# EAGLE board test (EAGLE 6.3)
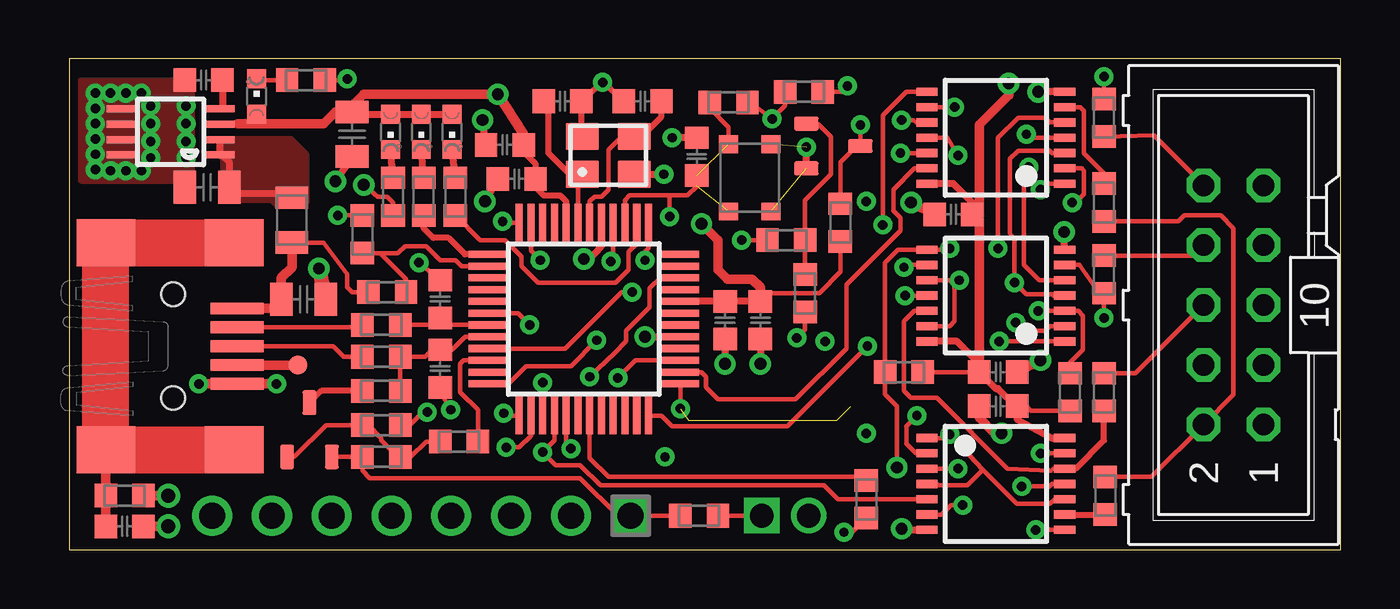
[diagram p0: board, top side]
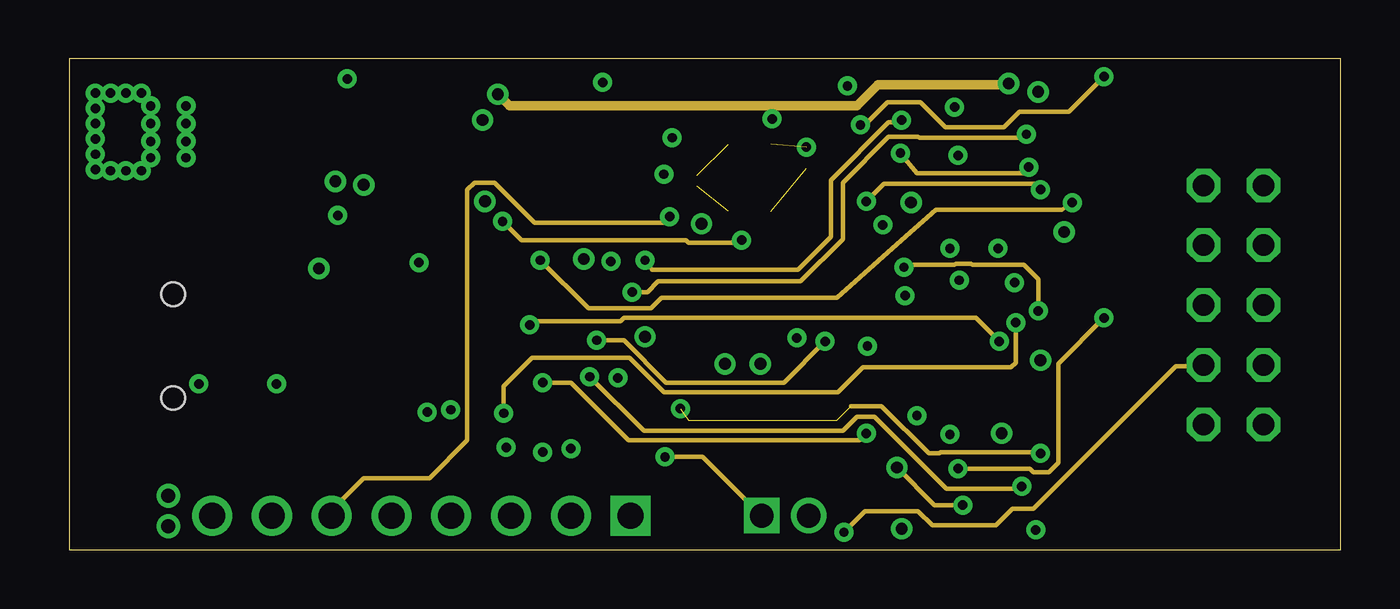
[diagram p1: board, inner layer Route2]
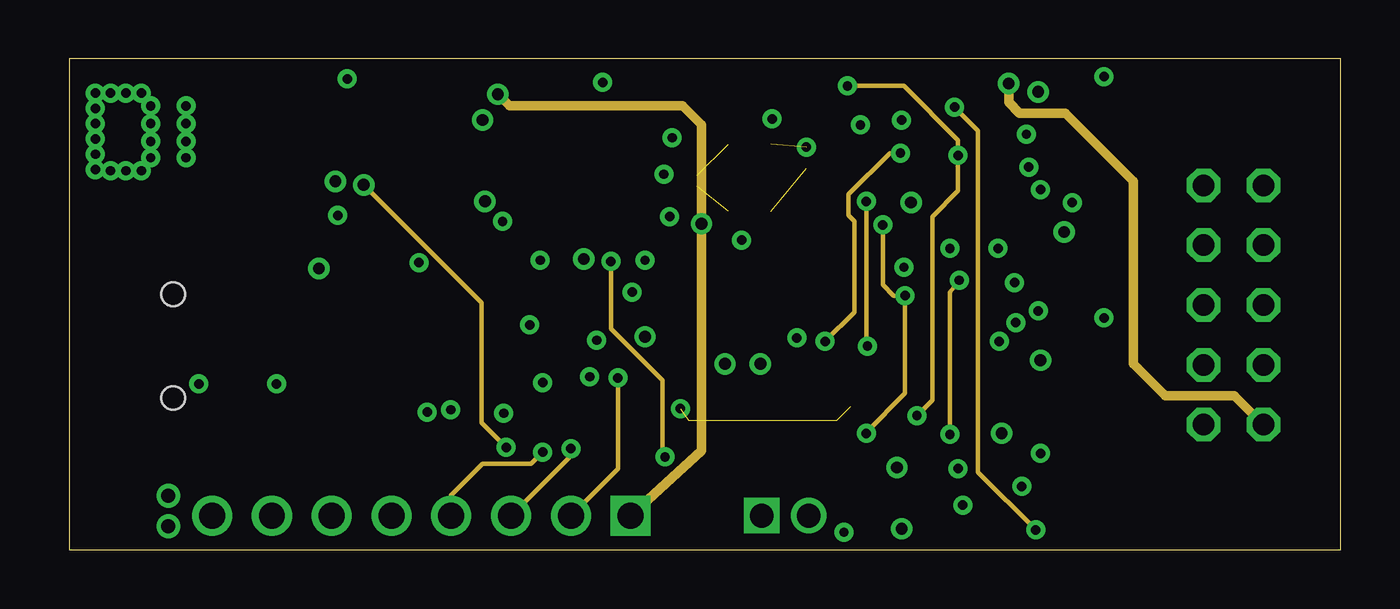
[diagram p2: board, inner layer Route15]
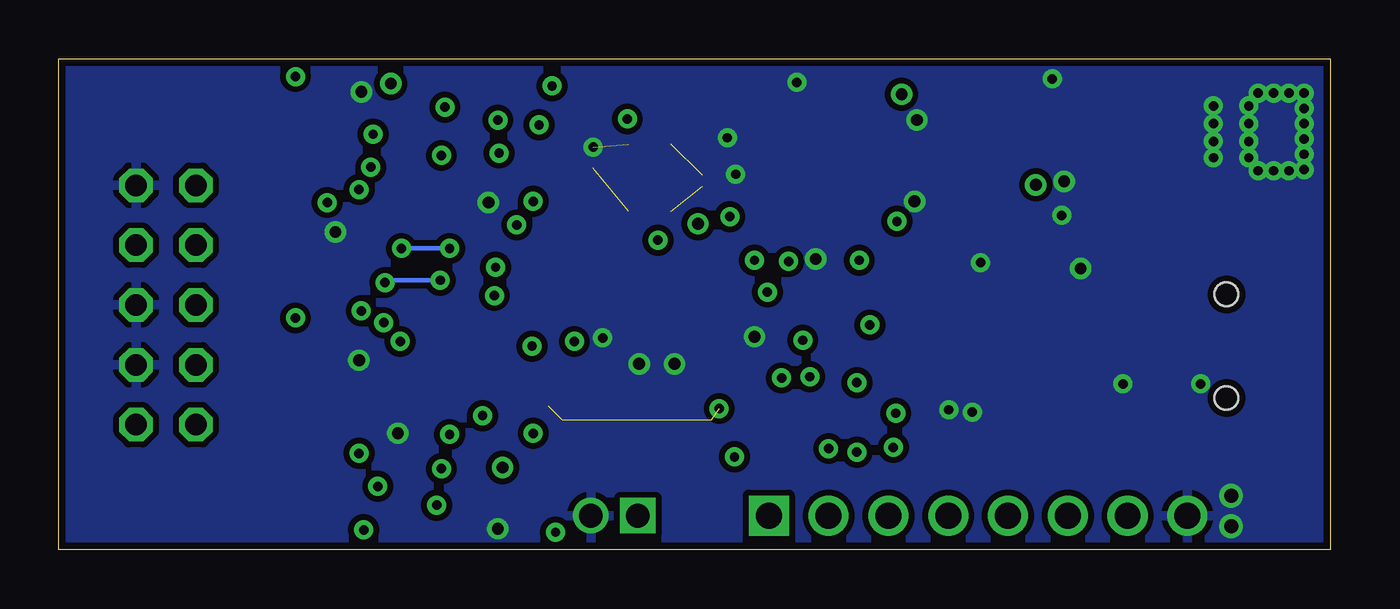
[diagram p3: board, bottom side, seen from below]

Size 54 x 20.85 mm. Coordinates in mm from the lower left corner, seen from the top.
Outline: 0,20.85 0,0 54,0 54,20.85 0,20.85
Copper layers (1+2*15+16): Top 0.035mm / dielectric 0.45mm / Route2 0.035mm / dielectric 0.45mm / Route15 0.035mm / dielectric 0.45mm / Bottom 0.035mm
Design rules "default": minimum track width 0.2mm, minimum drill 0.4mm, track to track 0.15mm, track to pad 0.15mm, pad to pad 0.15mm, via to via 0.15mm, smd to smd 0.15mm, copper to edge 0.3mm, drill to drill 8mil, minimum pad ring 10mil, minimum via ring 8mil, stop-mask expansion 4mil, vias tented up to drill 0.5mm, thermal gap 10mil

## Footprints (pad centres in the part's own frame; a part is rotated, then mirrored left to right if it is on the bottom)
CAPC2012N = smd 0.95 x 1.4: 1 -0.95,0; 2 0.95,0
CAPC1608N = smd 0.95 x 1: 1 -0.8,0; 2 0.8,0
MINI-USB_SHIELD5P4 = smd 2.25 x 0.5: 1 -0.625,1.6; 2 -0.625,0.8; 3 -0.625,0; 4 -0.625,-0.8; 5 -0.625,-1.6 | smd 2.5 x 2: M1 -6.2,-4.4; M2 -6.2,4.4; M3 -0.75,4.4; M4 -0.75,-4.4 | hole 1: -3.35,-2.2; -3.35,2.2
QFP50P900X900X160-48N = smd 0.3 x 1.6: 1 -2.75,-4.1; 2 -2.25,-4.1; 3 -1.75,-4.1; 4 -1.25,-4.1; 5 -0.75,-4.1; 6 -0.25,-4.1; 7 0.25,-4.1; 8 0.75,-4.1; 9 1.25,-4.1; 10 1.75,-4.1; 11 2.25,-4.1; 12 2.75,-4.1; 25 2.75,4.1; 26 2.25,4.1; 27 1.75,4.1; 28 1.25,4.1; 29 0.75,4.1; 30 0.25,4.1; 31 -0.25,4.1; 32 -0.75,4.1; 33 -1.25,4.1; 34 -1.75,4.1; 35 -2.25,4.1; 36 -2.75,4.1 | smd 1.6 x 0.3: 13 4.1,-2.75; 14 4.1,-2.25; 15 4.1,-1.75; 16 4.1,-1.25; 17 4.1,-0.75; 18 4.1,-0.25; 19 4.1,0.25; 20 4.1,0.75; 21 4.1,1.25; 22 4.1,1.75; 23 4.1,2.25; 24 4.1,2.75; 37 -4.1,2.75; 38 -4.1,2.25; 39 -4.1,1.75; 40 -4.1,1.25; 41 -4.1,0.75; 42 -4.1,0.25; 43 -4.1,-0.25; 44 -4.1,-0.75; 45 -4.1,-1.25; 46 -4.1,-1.75; 47 -4.1,-2.25; 48 -4.1,-2.75
MSOP08 = smd 0.3 x 1.2: 1 -0.976,-2.113; 2 -0.326,-2.113; 3 0.324,-2.113; 4 0.974,-2.113; 5 0.974,2.112; 6 0.324,2.112; 7 -0.326,2.112; 8 -0.976,2.112
TSSOP14 = smd 0.35 x 0.9: 1 -1.95,-2.925; 2 -1.3,-2.925; 3 -0.65,-2.925; 4 0,-2.925; 5 0.65,-2.925; 6 1.3,-2.925; 7 1.95,-2.925; 8 1.95,2.925; 9 1.3,2.925; 10 0.65,2.925; 11 0,2.925; 12 -0.65,2.925; 13 -1.3,2.925; 14 -1.95,2.925
HDRV2W50P200_1X2_400X200X600B = drill 1 pad 1.5 square: 1 -1,0 | drill 1 pad 1.5: 2 1,0
ML10 = drill 0.914 octagon: 1 -5.08,-1.27; 2 -5.08,1.27; 3 -2.54,-1.27; 4 -2.54,1.27; 5 0,-1.27; 6 0,1.27; 7 2.54,-1.27; 8 2.54,1.27; 9 5.08,-1.27; 10 5.08,1.27
HDRV8W64P254_1X8_2032X254X838B = drill 1.1 pad 1.7 square: 1 -8.89,0 | drill 1.1 pad 1.7: 2 -6.35,0; 3 -3.81,0; 4 -1.27,0; 5 1.27,0; 6 3.81,0; 7 6.35,0; 8 8.89,0
CHIPLED_0603 = smd 0.8 x 0.8: A 0,-0.75; C 0,0.75
AKER_C3E = smd 1.4 x 1.15: 1 -1.1,-0.8; 2 1.1,-0.8; 3 1.1,0.8; 4 -1.1,0.8
RESC1608X55N = smd 0.95 x 1: 1 -0.8,0; 2 0.8,0
RESC2012X60N = smd 0.95 x 1.4: 1 -0.95,0; 2 0.95,0
TL3700A = smd 0.75 x 0.8: 1 -1.425,-0.9; 2 1.425,-0.9; 3 1.425,0.9; 4 -1.425,0.9
SOT95P237X111-3N = smd 1.05 x 0.6: 1 -1.15,0.95; 2 -1.15,-0.95; 3 1.15,0
TP080 = smd 0.8 x 0.8: TP 0,0

## Placement (x,y rotation side)
C1  10u  [CAPC2012N]  9.95,10.65 180 top
C2  4u7  [CAPC2012N]  5.85,15.4 0 top
C3  10u  [CAPC2012N]  12,17.65 90 top
C4  18p  [CAPC1608N]  15.75,7.7 90 top
C5  18p  [CAPC1608N]  15.75,10.65 270 top
C6  470p  [CAPC1608N]  5.7,19.95 0 top
C7  100n  [CAPC1608N]  19,15.75 0 top
C8  10u  [CAPC1608N]  29.35,9.75 90 top
C9  100n  [CAPC1608N]  18.5,17.2 0 top
C10  10u  [CAPC1608N]  27.85,9.75 90 top
C11  18p  [CAPC1608N]  24.35,19.05 180 top
C12  18p  [CAPC1608N]  20.95,19.05 0 top
C13  100n  [CAPC1608N]  26.65,16.7 270 top
C99  10n  [CAPC1608N]  2.35,1 180 top
C300  100n  [CAPC1608N]  39.45,6.1 0 top
C400  100n  [CAPC1608N]  39.45,7.55 180 top
C500  100n  [CAPC1608N]  37.55,14.25 0 top
CON1  MINI-USB_SHIELD5P4-B  [MINI-USB_SHIELD5P4]  7.75,8.65 0 top
IC1  [QFP50P900X900X160-48N]  21.85,9.8 90 top
IC2  MIC5219-3.3YMM  [MSOP08]  4.3,17.75 90 top
IC3  74LVC125A  [TSSOP14]  39.35,17.5 90 top
IC4  74LVC126A  [TSSOP14]  39.35,10.8 90 top
IC5  74LVC125A  [TSSOP14]  39.35,2.8 270 top
JP1  JUMPER  [HDRV2W50P200_1X2_400X200X600B]  30.4,1.45 0 top
JP2  [ML10]  49.45,10.4 90 top
JP3  HDRV8P254_1X8  [HDRV8W64P254_1X8_2032X254X838B]  14.95,1.45 180 top
LED1  red  [CHIPLED_0603]  16.25,17.75 180 top
LED2  green  [CHIPLED_0603]  14.95,17.75 180 top
LED3  blue  [CHIPLED_0603]  13.65,17.75 180 top
LED44  ??  [CHIPLED_0603]  7.95,19.25 0 top
Q1  12MHz  [AKER_C3E]  22.89,16.75 0 top
R1  NP  [RESC1608X55N]  13.25,5.3 0 top
R2  2k2  [RESC1608X55N]  16.55,4.6 180 top
R3  10k  [RESC1608X55N]  13.5,10.95 0 top
R4  10k  [RESC1608X55N]  13.25,3.95 0 top
R5  100k  [RESC1608X55N]  12.45,13.4 90 top
R6  0R0  [RESC2012X60N]  9.45,14 270 top
R7  1k5  [RESC1608X55N]  13.25,6.75 0 top
R8  33R  [RESC1608X55N]  13.25,9.55 180 top
R9  33R  [RESC1608X55N]  13.25,8.2 180 top
R10  ??  [RESC1608X55N]  10.05,19.95 180 top
R11  22k  [RESC1608X55N]  31.2,19.45 180 top
R12  0R0  [RESC1608X55N]  44,2.3 270 top
R13  22k  [RESC1608X55N]  35.45,7.55 0 top
R14  0R0  [RESC1608X55N]  33.85,2.15 90 top
R15  0R0  [RESC1608X55N]  43.95,6.7 270 top
R16  0R0  [RESC1608X55N]  43.95,11.7 270 top
R17  0R0  [RESC1608X55N]  43.95,14.75 90 top
R18  10k  [RESC1608X55N]  32.75,13.9 90 top
R19  22k  [RESC1608X55N]  42.5,6.7 270 top
R20  100R  [RESC1608X55N]  43.95,18.35 90 top
R21  10k  [RESC1608X55N]  30.45,13.15 0 top
R22  10k  [RESC1608X55N]  31.25,10.9 270 top
R23  10k  [RESC1608X55N]  26.75,1.45 180 top
R24  10k  [RESC1608X55N]  28,19 0 top
R25  ??  [RESC1608X55N]  16.4,15 90 top
R26  ??  [RESC1608X55N]  15.05,15 90 top
R27  ??  [RESC1608X55N]  13.75,15 90 top
R99  1M  [RESC1608X55N]  2.35,2.3 180 top
SW1  [TL3700A]  28.9,15.8 270 top
T1  BC807-25-N  [SOT95P237X111-3N]  10.2,5.1 90 top
T2  BC817-25-N  [SOT95P237X111-3N]  32.45,17.15 0 top
TP22  [TP080]  9.7,7.85 180 top

## Library data of the parts
C1-C13 C99 C300 C400 C500 = x-capacitor
CON1 JP1 JP3 TP22 = x-connector
IC1 = xyz
IC2 = v-reg-micrel; OC_FARNELL: unknown; OC_NEWARK: unknown
IC3-IC5 = 74xx-eu
JP2 = con-ml; OC_FARNELL: unknown; OC_NEWARK: unknown
LED1-LED3 LED44 = led
Q1 = libtest
R1-R27 R99 = x-resistor
SW1 = x-switch
T1 T2 = x-transistor

## Nets
+3V3: C3.2 C7.2 C8.2 C9.2 C10.2 C300.2 C400.2 C500.2 IC1.8 IC1.44 IC2.3 IC3.14 IC4.14 IC5.14 JP2.1 JP3.1 LED1.A LED2.A LED3.A LED44.A R4.1 R11.2 R13.2 R18.1 R19.2 R23.2 R24.2 T1.2
+5V: C1.2 CON1.1 R3.1 R6.2
D+: CON1.3 R9.2
D-: CON1.2 R8.2
DEBUG_MOD: IC3.3 IC4.4 IC4.10 IC4.13 IC5.1 IC5.4 IC5.10
GND: C1.1 C2.1 C3.1 C4.1 C5.1 C6.1 C7.1 C8.1 C9.1 C10.1 C11.2 C12.2 C13.1 C99.1 C300.1 C400.1 C500.1 CON1.5 IC1.5 IC1.41 IC2.5 IC2.6 IC2.7 IC2.8 IC3.7 IC4.7 IC5.7 JP1.2 JP2.3 JP2.5 JP2.9 JP3.8 Q1.2 Q1.4 R1.2 R5.2 R10.1 R22.2 R99.1 SW1.3 SW1.4 T2.2
IN_TDO: IC4.12 IC5.12 R15.2
IN_TMS: IC5.9 R12.2
LATCH_TDI: IC3.11 IC5.2 R11.1
LATCH_TMS: IC4.3 IC4.9 R19.1
N$1: C2.2 IC2.1 IC2.2 R6.1
N$2: C6.2 IC2.4
N$3: LED44.C R10.2
N$4: CON1.4 TP22.TP
N$5: R1.1 R2.2 R4.2 T1.1
N$6: C99.2 CON1.M1 CON1.M2 CON1.M3 CON1.M4 R99.2
N$7: R7.1 T1.3
N$8: C11.1 IC1.6 Q1.3
N$9: C12.1 IC1.7 Q1.1
N$10: R21.2 R22.1 T2.1
N$12: R18.2 R20.2 T2.3
N$13: LED1.C R25.2
N$14: LED2.C R26.2
N$15: LED3.C R27.2
NC/TDI: JP2.8 R16.1
NRESET: JP2.10 R20.1
OUT_TDI: IC4.6 IC5.3 R16.2
OUT_TMS: IC3.6 R17.2
PIO0_0: C13.2 IC1.3 JP3.6 R24.1 SW1.1 SW1.2
PIO0_1: IC1.4 JP1.1 R23.1
PIO0_3: IC1.14 R3.2 R5.1
PIO0_6: IC1.22 R2.1
PIO0_8: IC1.27 IC3.8 IC4.11
PIO0_9: IC1.28 IC5.5 JP3.4
PIO0_10: IC1.29 JP3.3
PIO1_0: IC1.33
PIO1_3: IC1.39 JP3.2
PIO1_6: IC1.46 IC5.11
PIO2_0: IC1.2 R25.1
PIO2_1: IC1.13 R26.1
PIO2_2: IC1.26 R27.1
PIO2_3: IC1.38 IC3.13
PIO2_4: IC1.18 IC4.1
PIO2_5: IC1.21 IC3.4
PIO2_6: IC1.1 IC3.10
PIO2_7: IC1.11 IC3.2
PIO2_8: IC1.12 R21.1
PIO2_9: IC1.24 IC3.12 IC4.5
PIO2_10: IC1.25 IC4.2
PIO2_11: IC1.31 R14.2
PIO3_0: IC1.36 IC3.1
PIO3_1: IC1.37 IC5.13
SPI_MISO: IC3.9 IC5.8
SPI_MOSI: IC3.5 IC4.8 IC5.6 R13.1
SWDCLK/TCLK: JP2.4 R14.1
SWDIO/TMS: JP2.2 R12.1 R17.1
SWO/TDO: JP2.6 R15.1
USB_DM: C5.2 IC1.19 R8.1
USB_DP: C4.2 IC1.20 R7.2 R9.1

## Tracks (layer width: path | path; a pad name or v marks a point on that pad's centre or on a via)
+3V3  (via drill 0.4, 0.5)
  Top 0.2: C400.2 R13.2 | R19.2 40.85,5.9 40.7,6.05 40.3,6.05 C300.2 | R18.1 32.75,11.8 31.85,10.9 29.45,10.9 29.35,10.8 | R23.2 JP3.1 23.3,1.45 21.7,3.05 12.75,3.05 12.45,3.35 R4.1 T1.2 | R24.2 28.9,19 v29.85,18.3 30.4,18.85 R11.2
  Top 0.25: C9.2 19.3,16.9 19.8,16.4 C7.2 19.8,15.4 20.15,15.05 20.85,15.05 21.1,14.8 21.1,13.9
  Top 0.3: IC1.8 C10.2 C8.2 | C3.2 12.35,18.6 12.45,18.5 LED3.A LED2.A LED1.A | C500.2 38.55,14.55 37.55,15.55 IC3.14 | IC4.14 37.7,8.85 38.65,7.9 C400.2 39.35,6.85 39.45,6.85 40.2,6.1 C300.2 40.25,5.55 41.75,4.75 IC5.14 | IC2.3 7.12,18.07 7.15,18.1
  Top 0.4: C9.2 19.3,17.65 v18.2,19.35 12.5,19.35 12,18.85 C3.2 11.3,18.6 10.8,18.1 7.85,18.1 | C400.2 38.65,14.05 C500.2 38.65,14.2 38.65,18.05 39.9,19.3 v39.9,19.8 | C8.2 29.35,10.8 29.35,11.15 29,11.5 27.95,11.5 27.55,11.9 27.55,13.15 v26.85,13.85 | 7.85,18.1 7.15,18.1 | LED44.A 7.95,18.2 7.85,18.1
  Route2 0.2: v29.85,18.3 29.85,18.75 29.75,18.85
  Route2 0.4: v18.2,19.35 18.7,18.85 29.75,18.85 33.45,18.85 34.35,19.75 39.85,19.75 v39.9,19.8
  Route15 0.4: v39.9,19.8 39.9,19 40.35,18.55 42.3,18.55 45.2,15.65 45.2,7.9 46.55,6.55 49.49,6.55 JP2.1 | v18.2,19.35 18.7,18.85 26.05,18.85 26.85,18.05 v26.85,13.85 26.85,4.2 JP3.1
+5V
  Top 0.2: R3.1 12,10.95 11.8,11.15 11.8,11.7 10.8,13.05 R6.2
  Top 0.4: CON1.1 8.95,10.25 C1.2 9,11.55 9.45,12 R6.2
D+
  Top 0.2: CON1.3 11.2,8.65 11.65,8.2 R9.2
D-
  Top 0.2: CON1.2 12.2,9.45 R8.2
DEBUG_MOD  (via drill 0.4)
  Top 0.2: IC3.3 41.75,16.85 41.65,16.95 40.3,16.95 39.95,16.6 39.95,13.45 40.15,13.2 v40.15,11.35 40.65,10.85 41.75,10.85 41.8,10.8 IC4.4 | IC4.10 37.4,11.45 37.6,11.25 | 37.6,11.25 37.6,9.7 37.4,9.5 IC4.13 | 37.6,11.25 37.75,11.25 v37.8,11.45 | IC5.1 37.25,4.75 v37.4,4.9 38.8,3.4 | IC5.4 36.85,2.8 36.9,2.75 38.15,2.75 38.8,3.4 | 38.8,3.4 40.25,1.95 41.65,1.95 41.85,2.15 IC5.10
  Route15 0.2: v37.4,4.9 37.4,10.95 v37.8,11.45
  Bottom 0.2: v37.8,11.45 40.15,11.45 v40.15,11.35
GND  (via drill 0.4, 0.5, 0.6)  (2 unrouted)
  Top 0.2: v14.85,12.2 C5.1 | C4.1 15.8,6.6 v16.2,5.95 | R5.2 v11.4,14.2 | R22.2 31.25,9.35 v30.9,9 | R1.2 14.45,5.3 14.85,5.7 v15.2,5.85 | R10.1 11.65,19.95 v11.8,20
  Top 0.25: Q1.4 21.95,17.71 21.95,17.8 21.75,18 C12.2 v22.65,19.85 C11.2
  Top 0.3: C9.1 v17.55,18.25 | v17.65,14.8 C7.1 | C10.1 v27.85,7.9 | C8.1 v29.35,7.9 | v24.45,9.05 IC1.5 | 22.6,13.9 22.6,12.9 22.1,12.35 v21.85,12.35 | Q1.2 v25.25,15.95 | C3.1 v11.3,15.65 | IC4.7 v42.25,13.5 | IC5.7 35.75,0.85 35.55,0.7 v35.35,0.9 | IC3.7 v41.15,19.45 | C13.1 v25.6,17.5 | T2.2 v31.3,17.1
  Top 0.4: C99.1 v4.2,1 | R99.1 v4.2,2.3 | CON1.5 v5.5,7.05 v8.8,7.05 | C400.1 v41.25,8.05 | C300.1 38.65,5.6 39.3,4.95 v39.6,4.95 | C500.1 v35.75,14.75
  Top 0.6: C1.1 v10.6,11.95
  other vias: 1.75,19.4 2.4,19.4 1.1,19.4 1.1,18.75 1.1,16.8 1.1,17.45 1.1,18.1 1.1,16.15 1.75,16.1 2.4,16.1 3.05,16.1 3.45,16.65 3.45,17.35 3.45,18.1 3.45,18.85 3.05,19.4 4.95,18.85 4.95,16.65 4.95,17.35 4.95,18.1
  pour Bottom (isolate 0.25): 0.3,20.6 53.75,20.65 53.8,0.25 0.25,0.25
  pour Top (isolate 0.3, no thermals): 0.5,19.9 0.5,15.7 5.2,15.7 5.2,19.9
IN_TDO
  Top 0.2: IC4.12 35.9,10.15 35.45,9.7 35.45,6.75 35.75,6.45 36.85,6.45 39.85,3.45 41.7,3.35 41.8,3.45 IC5.12
  Top 0.25: IC5.12 42.75,3.45 43.95,4.65 R15.2
IN_TMS
  Top 0.25: IC5.9 R12.2
LATCH_TDI  (via drill 0.4)
  Top 0.2: 37.25,17.5 IC3.11 37.3,17.5 v37.75,16.75 | v36,5.7 35.55,5.25 35.55,4.5 35.95,4.1 IC5.2 | R11.1 32.8,19.45 v33.05,19.7
  Route15 0.2: v36,5.7 36.65,6.35 36.65,14.15 37.75,15.25 v37.75,16.75 37.75,17.4 35.45,19.7 v33.05,19.7
LATCH_TMS  (via drill 0.4)
  Top 0.2: IC4.9 35.55,12.1 v35.45,12 | v41.15,10.15 IC4.3 42.85,10.15 43.05,9.95 43.05,8.5 42.5,7.95 R19.1
  Route2 0.2: v35.45,12 35.55,12.1 37.6,12.1 37.65,12.15 38.3,12.15 38.35,12.1 40.55,12.1 41.15,11.5 v41.15,10.15
N$1
  Top 0.3: IC2.2 IC2.1 6.48,16.77 6.8,16.45 C2.2 7.05,15.15 9,15.15 9.2,14.95 R6.1
  pour Top (isolate 0.25, no thermals): 6.45,17.45 9.4,17.45 10.05,16.8 10.05,14.75 9.95,14.65 8.8,14.65 8.7,14.75 8.65,14.8 8.6,14.85 6.7,14.85 6.55,15 6.55,16.6 6.45,16.7
N$2
  Top 0.3: C6.2 6.5,18.81 IC2.4
N$3
  Top 0.2: R10.2 8,19.95 LED44.C
N$4
  Top 0.4: CON1.4 TP22.TP
N$5
  Top 0.2: T1.1 9.55,3.95 10.9,5.3 R1.1 12.7,5.3 13.25,4.75 13.25,4.65 13.95,3.95 R4.2 14.5,3.95 15.15,4.6 R2.2
N$6
  Top 0.4: CON1.M1 R99.2 C99.2
  Top 2: CON1.M4 CON1.M1 CON1.M2 CON1.M3
N$7
  Top 0.25: R7.1 10.7,6.75 T1.3
N$8
  Top 0.2: Q1.3 23.45,17.55 22.9,17 22.9,15.3 22.6,15 22.3,15 22.1,14.8 22.1,13.9 22.15,13.95
  Top 0.25: Q1.3 24.3,17.55 25.15,18.4 C11.1
N$9
  Top 0.2: 21.6,13.9 21.6,15.78 21.37,15.78
  Top 0.25: 21.37,15.78 Q1.1 21.25,15.95 20.35,16.85 20.35,18.55 20.15,18.75 C12.1
N$10
  Top 0.2: R22.1 R21.2 31.25,14.85 32.35,15.95 32.35,17.55 31.8,18.1 T2.1
N$12  (via drill 0.4)
  Top 0.2: v33.6,18.05 T2.3 33.6,17.3 32.75,16.45 R18.2 | v43.95,20.1 R20.2
  Route2 0.2: v33.6,18.05 33.8,18.05 34.75,19 36.15,19 37.2,17.95 39.7,17.95 40.35,18.6 42.45,18.6 v43.95,20.1
N$13
  Top 0.3: R25.2 LED1.C
N$14
  Top 0.3: R26.2 LED2.C
N$15
  Top 0.3: R27.2 LED3.C
NC/TDI
  Top 0.2: R16.1 47.74,12.5 JP2.8
NRESET
  Top 0.2: R20.1 46.06,17.6 JP2.10
OUT_TDI  (via drill 0.4)
  Top 0.2: IC4.6 42.9,12.1 43.5,11.25 R16.2 v43.95,9.85 | IC5.3 v37.75,3.45
  Route2 0.2: v37.75,3.45 40.8,3.45 40.95,3.3 41.6,3.3 42,3.7 42,7.9 v43.95,9.85
OUT_TMS
  Top 0.2: IC3.6 42.95,18.8 43.1,18.65 43.1,16.85 43.95,16 R17.2
PIO0_0  (via drill 0.4)  (2 unrouted)
  Top 0.2: 23.6,13.9 23.6,14.85 23.8,15.05 25.55,15.05 | 25.55,15.05 26.25,15.05 26.65,15.45 C13.2 | v25.5,14.15 25.5,15 25.55,15.05 | R24.1 27.2,18.75 28,17.95 SW1.1
  Route2 0.2: JP3.6 11.14,1.69 12.5,3.05 15.3,3.05 16.9,4.65 16.9,15.3 17.2,15.6 18.05,15.6 19.75,13.9 25.25,13.9 v25.5,14.15
PIO0_1  (via drill 0.4)
  Top 0.2: 23.1,13.9 23.1,12.35 v23,12.25 | R23.1 JP1.1
  Route2 0.2: v25.3,3.95 26.9,3.95 JP1.1
  Route15 0.2: v23,12.25 23,9.4 25.2,7.2 25.2,4.05 v25.3,3.95
PIO0_3
  Top 0.2: R5.1 13.2,12.6 | 13.2,12.6 13.95,12.6 14.25,12.9 15.15,12.9 15.75,12.3 16.4,12.3 16.65,12.05 17.75,12.05 | R3.2 14.3,11.5 13.2,12.6
PIO0_6
  Top 0.2: 17.75,8.05 16.75,8.05 16.6,7.9 16.6,6.7 17.35,5.95 R2.1
PIO0_8  (via drill 0.4)
  Top 0.2: v35.5,10.8 IC4.11 | 20.1,5.7 v20.1,7.1 | v34.55,13.8 34.55,18.45 35.55,19.45 IC3.8
  Route2 0.2: v20.1,7.1 21.3,7.1 23.75,4.65 33.55,4.65 v33.85,4.95
  Route15 0.2: v35.5,10.8 35,10.8 34.55,11.25 v34.55,13.8 | v35.5,10.8 35.55,10.75 | v33.85,4.95 33.85,5 35.5,6.65 v35.5,10.8
PIO0_9  (via drill 0.4)
  Top 0.2: IC5.5 32.65,2.15 32.05,2.75 22.55,2.75 21.7,3.6 20.65,3.6 v20.1,4.15 20.6,4.65 20.6,5.7
  Route15 0.2: JP3.4 16.22,2.32 17.55,3.65 19.6,3.65 v20.1,4.15
PIO0_10  (via drill 0.4)
  Top 0.2: 21.1,5.7 21.1,4.5 v21.3,4.3
  Route15 0.2: v21.3,4.3 21.3,3.99 JP3.3
PIO1_3  (via drill 0.4)
  Top 0.2: 25.95,8.05 24.05,8.05 v23.3,7.3
  Route15 0.2: v23.3,7.3 23.3,3.45 JP3.2
PIO1_6  (via drill 0.4)
  Top 0.2: v40.45,2.7 41.65,2.7 41.75,2.8 IC5.11 | v22.1,7.35 23.15,8.35 23.65,8.85 23.65,9.3 24.65,10.3 24.65,11.1 25.1,11.55 25.95,11.55
  Route2 0.2: v40.45,2.7 40.35,2.6 37.25,2.6 34.2,5.65 33.45,5.65 32.85,5.05 24.4,5.05 v22.1,7.35
PIO2_0
  Top 0.2: 16.45,14.2 R25.1 17.45,13.15 18.5,13.15 19.2,12.45 19.2,12.05 19.9,11.35 23.2,11.35 23.75,11.9 23.75,12.65 24.1,13 24.1,13.9
PIO2_1
  Top 0.25: 17.75,12.55 16.8,12.55 16.1,13.25 15.45,13.25 15.05,13.65 R26.1
PIO2_2  (via drill 0.4, 0.5)
  Top 0.2: v18.55,4.35 19.1,4.35 19.6,4.85 19.6,5.7 | v12.5,15.5 13.1,15 13.5,15 13.75,14.75 R27.1
  Route15 0.2: v12.5,15.5 17.5,10.5 17.5,5.4 v18.55,4.35
PIO2_3
  Top 0.2: 25.95,7.55 26.85,7.55 27.05,7.35 27.05,6.9 27.55,6.4 30.85,6.4 33,8.55 33,11.25 35.3,13.55 35.3,14.1 35,14.4 35,15.3 35.9,16.2 IC3.13
PIO2_4  (via drill 0.4)
  Top 0.2: 17.75,10.05 19.05,10.05 v19.55,9.55 | v39.5,8.85 IC4.1
  Route2 0.2: v19.55,9.55 19.6,9.55 19.75,9.7 23.4,9.7 23.55,9.85 38.5,9.85 v39.5,8.85
PIO2_5  (via drill 0.4)
  Top 0.2: 17.75,8.55 21.05,8.55 23.45,10.95 v23.9,10.95 | v40.65,17.65 40.8,17.65 40.95,17.5 IC3.4
  Route2 0.2: v40.65,17.65 40.5,17.5 36.1,17.5 36.05,17.55 34.8,17.55 32.85,15.6 32.85,13.2 31.05,11.4 25,11.4 24.55,10.95 v23.9,10.95
PIO2_6  (via drill 0.4)
  Top 0.2: 24.6,13.9 24.6,12.8 24.45,12.65 v24.45,12.3 | v35.35,18.25 35.85,18.25 35.95,18.15 IC3.10
  Route2 0.2: v24.45,12.3 24.75,11.9 30.95,11.9 32.35,13.3 32.35,15.7 34.8,18.15 35.25,18.15 v35.35,18.25
PIO2_7  (via drill 0.4)
  Top 0.2: IC3.2 43,16.2 43.1,16.1 43.1,15.1 42.75,14.75 v42.6,14.75 | v20,12.3 19.6,12.7 19.6,13.9
  Route2 0.2: v42.6,14.75 42.15,14.45 36.8,14.45 35.35,13.15 32.6,10.7 25.15,10.7 24.7,10.25 22.05,10.25 v20,12.3
PIO2_8  (via drill 0.4)
  Top 0.2: v28.55,13.15 R21.1 | v18.4,13.95 18.7,13.9 19.1,13.9
  Route2 0.2: v28.55,13.15 28.25,13.15 28.15,13.05 26.3,13.05 26.2,13.15 19.2,13.15 v18.4,13.95
PIO2_9  (via drill 0.4)
  Top 0.2: v35.3,16.85 IC3.12 | v22.4,8.9 21.3,7.8 19.4,7.8 18.7,7.1 17.8,7.1 17.75,7.05 | IC4.5 41.2,11.45 40.55,12.1 40.55,16.05 v40.75,16.25
  Route2 0.2: v32.1,8.85 30.35,7.1 25.35,7.1 23.55,8.9 v22.4,8.9 | v40.75,16.25 40.5,16 36,16 v35.3,16.85
  Route15 0.2: v32.1,8.85 33.35,10.1 33.35,13.95 33.1,14.2 33.1,15.1 34.85,16.85 v35.3,16.85
PIO2_10  (via drill 0.4)
  Top 0.2: IC4.2 41.65,9.5 41.45,9.3 40.55,9.3 v40.2,9.65 | v18.45,5.8 18.55,5.7 19.1,5.7
  Route2 0.2: v40.2,9.65 40.2,7.95 40,7.75 33.7,7.75 32.65,6.7 25.25,6.7 23.8,8.15 19.65,8.15 18.45,6.95 v18.45,5.8
PIO2_11
  Top 0.2: 33.85,3.3 R14.2 33.67,3.12 33.65,3.1 22.9,3.1 22.1,3.9 22.1,5.7
PIO3_0  (via drill 0.4)
  Top 0.2: v41.25,15.3 41.5,15.55 IC3.1 | 24.6,5.7 25.15,5.7 25.6,5.25 30.5,5.25 v33.9,8.65
  Route2 0.2: v33.85,14.8 34.6,15.55 41,15.55 v41.25,15.3
  Route15 0.2: v33.85,14.8 33.85,9 34,8.9 v33.9,8.65
PIO3_1  (via drill 0.4)  (3 unrouted)
  Top 0.2: v41.25,4.1 IC5.13 | v25.95,6 25.95,7.05
  Route2 0.2: 33.2,6.1 34.5,6.1 36.5,4.1 36.95,4.1 37,4.15 41.05,4.15 41.1,4.1 v41.25,4.1
SPI_MISO  (via drill 0.4)
  Top 0.2: IC5.8 v41.05,0.85 | v37.6,18.8 IC3.9
  Route15 0.2: v41.05,0.85 38.6,3.3 38.6,17.8 v37.6,18.8
SPI_MOSI  (via drill 0.4, 0.5)
  Top 0.2: v35.15,3.5 35.15,6.1 34.65,6.6 R13.1 34.65,12.2 35.2,12.75 IC4.8 37.15,12.75 37.2,12.8 v37.4,12.8 | v37.95,1.9 37.45,1.9 37.05,1.5 IC5.6 | IC3.5 41.65,18.15 41.45,18.35 40.3,18.35 39.45,17.5 v39.45,12.8
  Route2 0.2: v37.95,1.9 36.75,1.9 v35.15,3.5
  Bottom 0.2: v37.4,12.8 v39.45,12.8
SWDCLK/TCLK  (via drill 0.4)
  Top 0.2: v32.9,0.75 33.25,0.75 R14.1
  Route2 0.2: v32.9,0.75 33.8,1.65 36.05,1.65 36.65,1.05 39.35,1.05 40.05,1.75 40.95,1.75 47,7.8 48.12,7.8 JP2.4
SWDIO/TMS
  Top 0.2: R17.1 47.1,13.95 47.35,14.2 48.9,14.2 49.45,13.65 49.45,6.59 JP2.2 45.96,3.1 R12.1
SWO/TDO
  Top 0.2: R15.1 45.28,7.5 JP2.6
USB_DM
  Top 0.2: 17.75,9.55 16.05,9.55 C5.2 15.45,9.55 R8.1
USB_DP
  Top 0.2: 17.75,9.05 16.8,9.05 16.25,8.5 C4.2 15.4,8.5 15.1,8.2 R9.1 R7.2